# Altium PCB Layout.PcbDoc
Units mm, origin at the board's own origin, x right, y up, seen from the top; angles counter-clockwise.
Board outline 26 x 15 mm, 2 copper layers (Top Layer, Bottom Layer); 18 components, 10 nets, 37 pads, 5 vias.
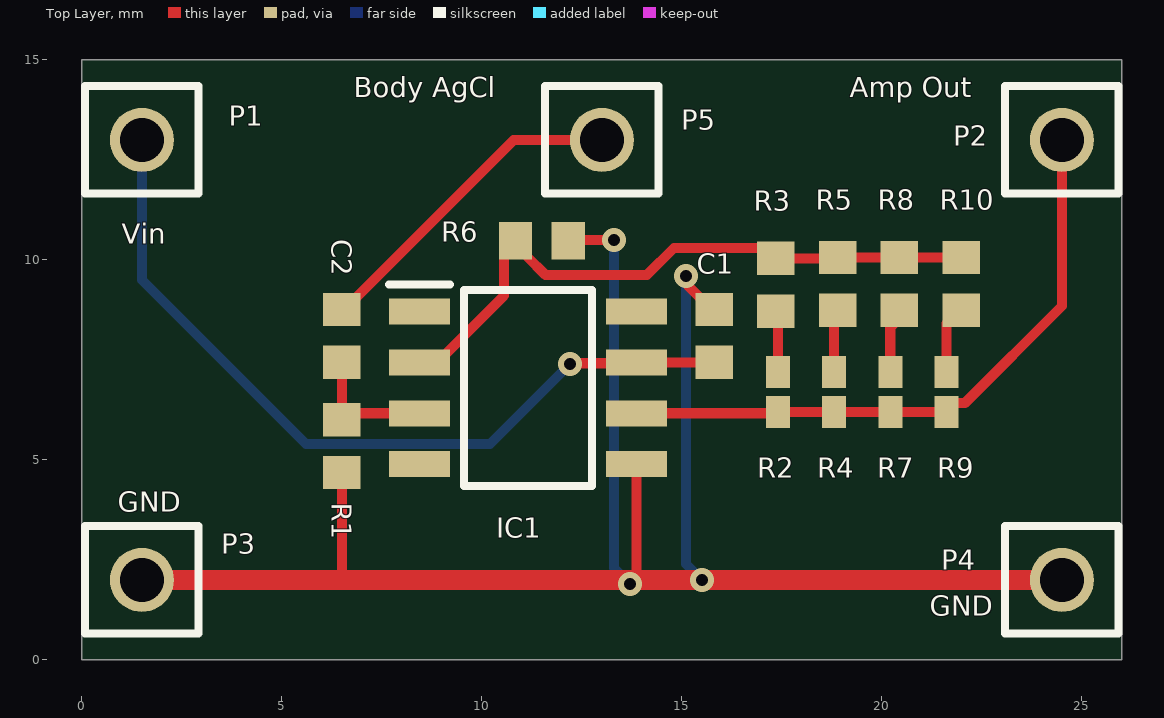
[diagram p0: Top Layer view]
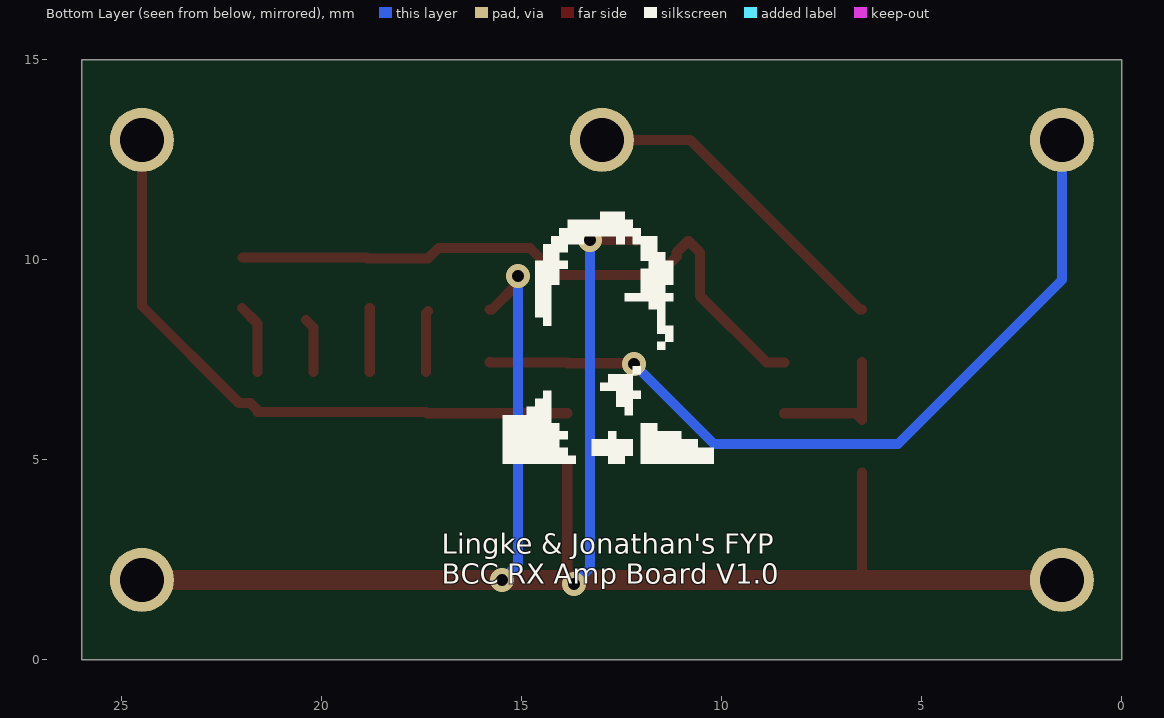
[diagram p1: Bottom Layer view, seen from below]
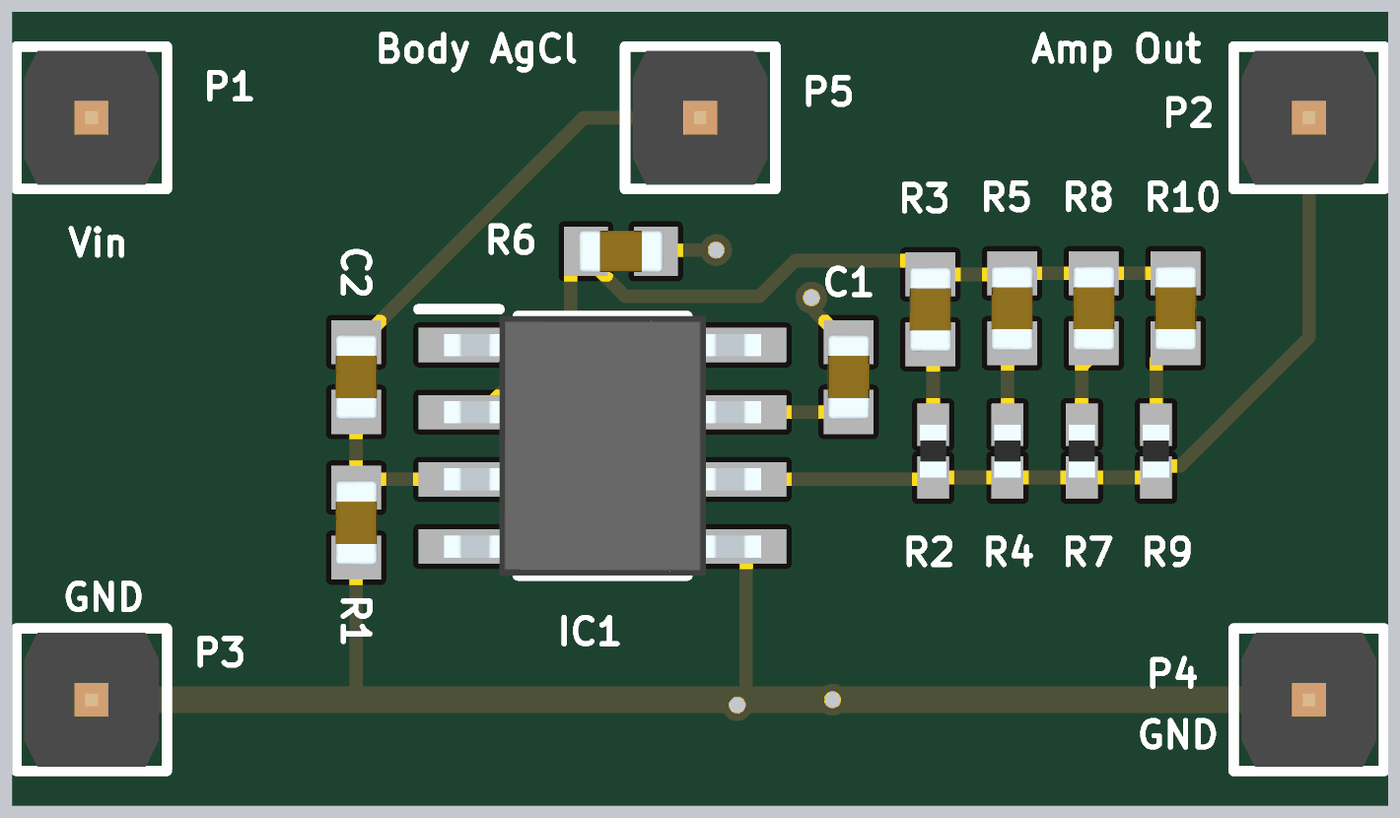
[diagram p2: 3D render of the assembled board from above, using the file's embedded part models]

## Layer stack, top to bottom
Top Solder: solder mask 0.0102, Solder Resist, Dk 3.5
Top Layer: signal copper 0.0356
Dielectric 1: dielectric 0.32, FR-4, Dk 4.8
Bottom Layer: signal copper 0.0356
Bottom Solder: solder mask 0.0102, Solder Resist, Dk 3.5

## Board outline
0,15 26,15 26,0 0,0

## Design rules (kind name [scope] priority, off if disabled: settings)
Clearance [All] p1: gap=0.254 ignorepadtopadclearanceinfootprint=TRUE except(0: Arc-Hole Track-Hole SMDPad-Hole THPad-Hole Via-Hole Fill-Hole Poly-Hole Region-Hole Text-Hole)
HoleToHoleClearance [All] p1: gap=0.1 allowstackedmicrovias=TRUE
MinimumSolderMaskSliver [All] p1: minsoldermaskwidth=0.1
PolygonConnect [All] p1: connectstyle=Direct reliefconductorwidth=0.254 reliefentries=4 polygonreliefangle="90 Angle" airgapwidth=0.254
RoutingVias [All] p1: holewidth=0.711 width=1.27 viastyle="Through Hole" minholewidth=0.3 minwidth=0.6 maxholewidth=0.711 maxwidth=1.27
SilkToSilkClearance [All] p1: silktosilkclearance=0.1
SilkToSolderMaskClearance [IsPad] p1: minsilkscreentomaskgap=0.1 clearancetoexposedcopper=TRUE
SolderMaskExpansion [All] p1: expansion=0.102 istentingtop=FALSE
Width [All] p1: maxlimit=1 minlimit=0.254 preferedwidth=0.254
26 further rules are at their usual default settings.

## Components (designator, comment, footprint, x,y, rotation, side; value= is the part's Value field where it differs from the comment)
C1 "0.1uF" 0603 15.803,8.1 r270 top
C2 "33p" 0603 6.5,8.1 r270 top
IC1 "LTC6268IS8#PBF" SOIC127P599X175-8N 11.154,6.8 r0 top
P1 "61300111121" 61300111121 1.5,13 r0 top
P2 "61300111121" 61300111121 24.5,13 r0 top
P3 "61300111121" 61300111121 1.5,2 r0 top
P4 "61300111121" 61300111121 24.5,2 r0 top
P5 "61300111121" 61300111121 13,13 r0 top
R1 "33k" 0603 6.5,5.346 r90 top
R2 "0R" 0402 17.4,6.7 r270 top
R3 "25K" 0603 17.348,9.379 r90 top
R4 "0R" 0402 18.804,6.7 r270 top
R5 "50K" 0603 18.892,9.4 r90 top
R6 "1k" 0603 11.5,10.476 r180 top
R7 "0R" 0402 20.208,6.7 r270 top
R8 "75K" 0603 20.436,9.4 r90 top
R9 "0R" 0402 21.613,6.7 r270 top
R10 "100K" 0603 21.98,9.4 r90 top

## Footprints (in the part's own frame and the unit in brackets; to place one, negate y for a bottom-side part, rotate by r counter-clockwise, add the part's x,y. Pads: shape width x height; smd on the part's side, far side on the other; paste and mask are expansions set on the pad)
0402 [mm]
  rect 0.8x0.6 smd: 1(-0.5,0) 2(0.5,0)
  body extent -0.5,-0.25 0.5,0.25, height 0.35
0603 [mm]
  rect 0.83x0.94 smd: 1(-0.66,0) 2(0.66,0)
  body extent -0.8,-0.4 0.8,0.4, height 0.9
61300111121 [mm] "Pin Header, pitch 2.54 mm, THT, Vertical, single row, 1p"
  round 1.6 hole 1.1: 1(0,0)
  silkscreen extent -1.42,-1.35 1.42,1.35, body extent -1.27,-1.27 1.27,1.27, height 8.57
SOIC127P599X175-8N [mm]
  rect 1.526x0.65 smd: 1(-2.712,1.905) 2(-2.712,0.635) 3(-2.712,-0.635) 4(-2.712,-1.905) 5(2.712,-1.905) 6(2.712,-0.635) 7(2.712,0.635) 8(2.712,1.905)
  silkscreen extent -3.47,-2.45 1.6,2.58, body extent -3,-2.45 3,2.45, height 1.75

## Part data
C1 C2: library part Capacitor, "Capacitor"
IC1: "Integrated Circuit", Manufacturer_Name="Linear Technology", Mouser2 Part Number=584-LTC6268IS8#PBF, Datasheet Link=https://componentsearchengine.com//LTC6268IS8#PBF.pdf, Height=1.752mm, Manufacturer_Part_Number=LTC6268IS8#PBF, Mouser2 Price/Stock=https://www.mouser.com/Search/Refine.aspx?Keyword=584-LTC6268IS8%23PBF
P1 P2 P3 P4 P5: "WR-PHD Pin Header, THT, pitch 2.54mm, Single Row, Vertical, 1p", Contact Resistance=20mOhm, Manufacturer="Wurth Elektronik", Operating Temperature="-40 to +105degC", Rated Current=3A, Withstanding Voltage=500VAC, Working Voltage=250VAC, ComponentLink1Description=Manufacturer, ComponentLink1URL=http://www.we-online.de, ComponentLink2Description=Datasheet, ComponentLink2URL=https://www.we-online.com/catalog/datasheet/61300111121.pdf, Gender="Pin Header", Manufacturer Part Number=61300111121, Mounting Technology=THT, Orientation=Vertical, Packaging=Bag, Pin Number=1, Pitch=2.54mm, Published Date="May 2020", Row Number=Single
R1 R3 R5 R6 R8 R10: library part "Resistor 0603", "Resistor"
R2 R4 R7 R9: library part "Resistor 0402"

## Via types
v1: diameter 0.6, hole 0.3, Top Layer to Bottom Layer, 5 vias

## Nets (pads, with @x,y where several pads share a name; then routed paths per layer and width w, separated by ;. In a path a pad name is that pad's centre, name@x,y a point inside that pad or via, vN(x,y) a via of type N, cw(c..) or ccw(c..) an arc to the next point about the centre after c; other vN are vias at no path point)
GND: C1.1 IC1.5 P3.1 P4.1 R1.1 R6.1 | length 47.5
  Top Layer w0.254: R1.1 6.5,2.1 6.6,2 ; R6.1 12.184,10.5 v1(13.3,10.5) ; IC1.5 13.866,2.034 v1@13.9,2 ; v1(15.1,9.6) 15.166,9.534 15.166,9.342 15.748,8.76 C1.1
  Top Layer w0.5: P3.1 6.6,2 13.9,2 P4.1
  Bottom Layer w0.254: v1(13.3,10.5) 13.3,2.3 v1(13.7,1.9) ; v1(15.1,9.6) 15.1,2.4 v1(15.5,2)
NetC2_1: C2.1 P5.1 | length 8.3
  Top Layer w0.254: C2.1 6.555,8.76 10.795,13 P5.1
NetC2_2: C2.2 IC1.3 R1.2 | length 3.4
  Top Layer w0.254: C2.2 R1.2 6.659,6.165 IC1.3
NetIC1_2: IC1.2 R3.2 R5.2 R6.2 R8.2 R10.2 | length 16.2
  Top Layer w0.254: IC1.2 8.88,7.435 10.552,9.107 10.552,10.188 R6.2 11.128,10.188 11.128,10.084 11.587,9.625 14.125,9.625 14.8,10.3 17.087,10.3 R3.2 18.871,10.039 R5.2 R8.2 R10.2
NetR2_1: R2.1 R3.1 | length 1.5
  Top Layer w0.254: R3.1 17.4,8.667 R2.1
NetR4_1: R4.1 R5.1 | length 1.6
  Top Layer w0.254: R5.1@18.8,8.8 18.804,8.796 R4.1
NetR7_1: R7.1 R8.1 | length 1.4
  Top Layer w0.254: R7.1 20.208,8.309 R8.1@20.4,8.5
NetR9_1: R9.1 R10.1 | length 1.8
  Top Layer w0.254: R9.1 21.613,8.413 R10.1@22,8.8
Sig_out: IC1.6 P2.1 R2.2 R4.2 R7.2 R9.2 | length 15.9
  Top Layer w0.254: IC1.6 17.365,6.165 R2.2 R4.2 R7.2 R9.2 21.613,6.246 21.786,6.419 22.071,6.419 24.5,8.848 P2.1
Vin: C1.2 IC1.7 P1.1 | length 20.3
  Top Layer w0.254: v1(12.2,7.4) 12.218,7.418 13.849,7.418 IC1.7 15.799,7.435 C1.2
  Bottom Layer w0.254: P1.1 1.5,9.5 5.6,5.4 10.2,5.4 v1(12.2,7.4)
pads on no net: IC1.1 IC1.4 IC1.8

## Silkscreen, mask and mechanical layers (free items; w line width, h text height)
Top Overlay:
  text "Body AgCl" at 6.8,14.067 h0.5
  text "Amp Out" at 19.2,14.067 h0.5
  text "Vin" at 1,10.4 h0.5
  text "GND" at 0.9,3.7 h0.5
  text "GND" at 21.2,1.1 h0.5
Bottom Overlay:
  drawing of 5 lines, arcs and shapes, not listed
  text "Lingke & Jonathan's FYP / BCC RX Amp Board V1.0" at 17,1.9 h0.5
Board Outline:
  lines w0.2: -0.003,0 -0.003,14.997 0,15 26,15 26,0 -0.003,0